# Altium PCB STLINKV2-1.PcbDoc
Units mil, origin at the board's own origin, x right, y up, seen from the top; angles counter-clockwise.
Board outline 1970 x 575 mil, 2 copper layers (Top Layer, Bottom Layer); 51 components, 48 nets, 172 pads, 67 vias.
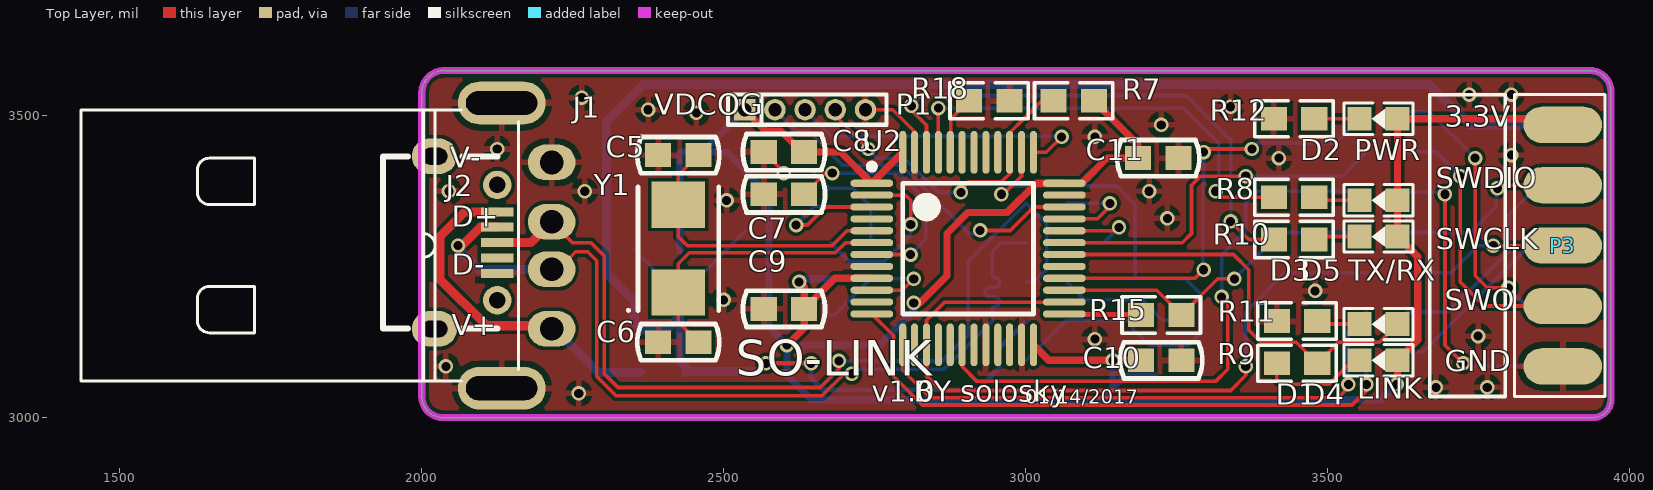
[diagram p0: Top Layer view]
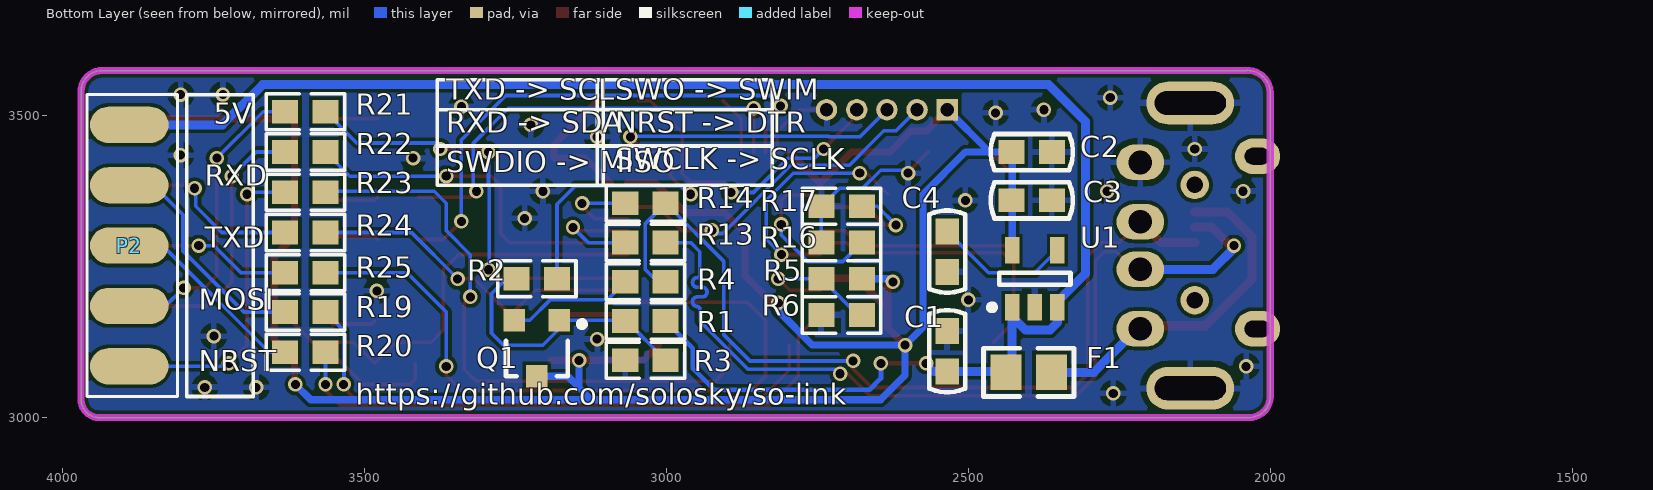
[diagram p1: Bottom Layer view, seen from below]
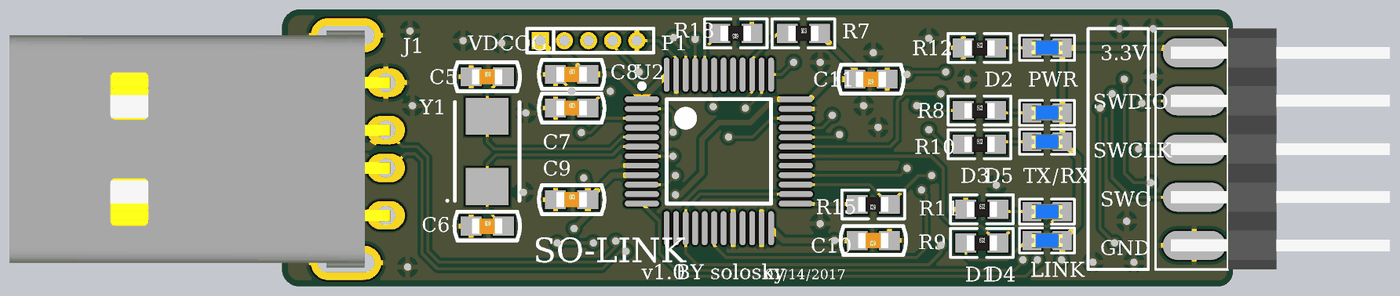
[diagram p2: 3D render of the assembled board from above, using the file's embedded part models]
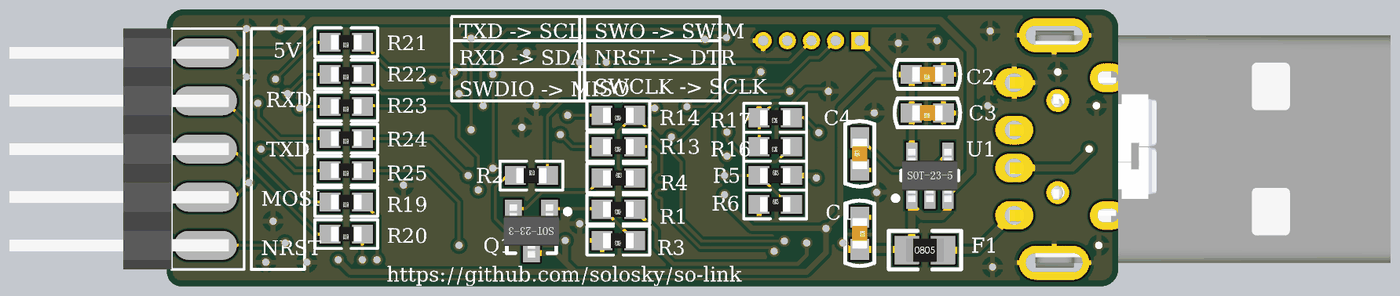
[diagram p3: 3D render of the assembled board from below, using the file's embedded part models]

## Layer stack, top to bottom
Top Solder: solder mask 0.4, Solder Resist, Dk 3.5
Top Layer: signal copper 1.4
Dielectric 1: dielectric 12.6, FR-4, Dk 4.8
Bottom Layer: signal copper 1.4
Bottom Solder: solder mask 0.4, Solder Resist, Dk 3.5

## Board outline
2035,3000 cw(c2035,3035) 2000,3035 2000,3540 cw(c2037.5,3537.5) 2040,3575 3935,3575 cw(c3935,3540) 3970,3540 3970,3030 cw(c3940,3030) 3940,3000

## Design rules (kind name [scope] priority, off if disabled: settings)
Clearance [All] p1: gap=6
ComponentClearance [All] p1 off: gap=10 collisioncheckmode=3 verticalgap=10 showdistances=FALSE
DiffPairsRouting [All] p1: maxlimit=10 minlimit=6 mostfreqgap=6 toplayer_minwidth=6 toplayer_maxwidth=15 toplayer_prefwidth=6 bottomlayer_minwidth=6 bottomlayer_maxwidth=15 bottomlayer_prefwidth=6 maxuncoupledlength=500
Height [All] p1 off: minheight=0 maxheight=1000 prefheight=500
PolygonConnect [All] p1: connectstyle=Relief reliefconductorwidth=10 reliefentries=4 polygonreliefangle="90 Angle" airgapwidth=10
RoutingVias [All] p1: holewidth=15 width=24 viastyle="Through Hole" minholewidth=15 minwidth=24 maxholewidth=15 maxwidth=24
SolderMaskExpansion [All] p1: expansion=4
UnpouredPolygon [All] p1: allowunpoured=FALSE
Width [All] p1: maxlimit=15 minlimit=6 preferedwidth=6
26 further rules are at their usual default settings.

## Classes and differential pairs
net class DIff: USB_N USB_P
differential pair USB: +USB_P -USB_N

## Components (designator, comment, footprint, x,y, rotation, side; value= is the part's Value field where it differs from the comment)
C1 "Cap" C-0603 2535,3110 r270 bottom
C2 "Cap" C-0603 2395,3440 r0 bottom
C3 "Cap" C-0603 2395,3360 r0 bottom
C4 "Cap" C-0603 2535,3275 r90 bottom
C5 "Cap" C-0603 2425,3435 r0 top
C6 "Cap" C-0603 2425,3125 r0 top
C7 "Cap" C-0603 2600,3370 r0 top
C8 "Cap" C-0603 2600,3440 r0 top
C9 "Cap" C-0603 2600,3180 r0 top
C10 "Cap" C-0603 3225,3095 r180 top
C11 "Cap" C-0603 3220,3430 r180 top
D1 "LED" SMT_LED_0603 3585,3155 r180 top
D2 "PWR" SMT_LED_0603 3585,3495 r180 top
D3 "DIN" SMT_LED_0603 3585,3360 r180 top
D4 "LED" SMT_LED_0603 3585,3095 r180 top
D5 "DOUT" SMT_LED_0603 3585,3300 r180 top
F1 "Fuse1" 0805-1 2400,3075 r180 bottom
J1 "USB" USB-B 2160,3285 r90 top
J2 "USB_M" USB_MICRO_5S_B 2125,3290 r90 top
P1 "SWD" SIP5-1.27 2585,3510 r180 top
P2 "P_BOTTOM" "HEADER 5" 3890,3485 r270 bottom
P3 "P_TOP" "HEADER 5" 3890,3085 r90 top
Q1 "NPN" SOT23-3 3215,3115 r0 bottom
R1 "Res1" 0603-1 3035,3160 r0 bottom
R2 "Res1" 0603-1 3215,3230 r180 bottom
R3 "Res1" 0603-1 3035,3095 r0 bottom
R4 "Res1" 0603-1 3035,3225 r180 bottom
R5 "Res2" 0603-1 2710,3230 r180 bottom
R6 "Res2" 0603-1 2710,3170 r180 bottom
R7 "Res2" 0603-1 3080,3525 r0 top
R8 "Res2" 0603-1 3445,3365 r0 top
R9 "Res2" 0603-1 3450,3090 r0 top
R10 "Res2" 0603-1 3445,3295 r0 top
R11 "Res2" 0603-1 3450,3160 r0 top
R12 "Res2" 0603-1 3445,3495 r0 top
R13 "Res2" 0603-1 3035,3290 r0 bottom
R14 "Res2" 0603-1 3035,3355 r0 bottom
R15 "Res2" 0603-1 3225,3170 r180 top
R16 "Res1" 0603-1 2710,3290 r0 bottom
R17 "Res1" 0603-1 2710,3350 r0 bottom
R18 "Res2" 0603-1 2940,3525 r180 top
R19 "Res2" 0603-1 3598.46,3175 r0 bottom
R20 "Res2" 0603-1 3598.46,3108.33 r0 bottom
R21 "Res2" 0603-1 3598.46,3506.67 r0 bottom
R22 "Res2" 0603-1 3598.46,3440 r0 bottom
R23 "Res2" 0603-1 3598.46,3373.33 r0 bottom
R24 "Res2" 0603-1 3598.46,3306.67 r0 bottom
R25 "Res2" 0603-1 3598.46,3240 r0 bottom
U1 "SPX3819" SOT23-5 2390,3230 r90 bottom
U2 "STM32F103CBT6" LQFP48_N 2905,3280 r0 top locked
Y1 "8M" "XAL5032 2-Leads" 2425,3280 r90 top

## Footprints (in the part's own frame and the unit in brackets; to place one, negate y for a bottom-side part, rotate by r counter-clockwise, add the part's x,y. Pads: shape width x height; smd on the part's side, far side on the other; paste and mask are expansions set on the pad)
0603-1 [mm] "0603带丝印"
  rect 1.1x1 smd: 1(-0.85,0) 2(0.85,0)
  silkscreen extent -1.65,-0.76 1.65,0.76, body extent -0.8,-0.4 0.8,0.4, height 0.3
0805-1 [mm] "0805带丝印"
  rect 1.3x1.5 smd: 1(-0.95,0) 2(0.95,0)
  silkscreen extent -1.91,-1.02 1.91,1.02, body extent -1,-0.62 1,0.63, height 0.5
C-0603 [mm] "贴片电容"
  rect 1.1x1 smd: 1(-0.85,0) 2(0.85,0)
  silkscreen extent -1.73,-0.76 1.73,0.76, body extent -0.8,-0.4 0.8,0.4, height 0.3
"HEADER 5" [mil]
  oval 60x130 smd: 1(0,0) 2(100,0) 3(200,0) 4(300,0) 5(400,0)
  silkscreen extent -50,-70 450,80, body extent -50,-406 450,48, height 70
LQFP48_N [mm] "Thin QFP, 48-Leads, Body 7x7mm, Pitch 0.5mm, IPC Medium Density"
  oval 1.8x0.3 smd: 1(-4.05,2.75) 2(-4.05,2.25) 3(-4.05,1.75) 4(-4.05,1.25) 5(-4.05,0.75) 6(-4.05,0.25) 7(-4.05,-0.25) 8(-4.05,-0.75) 9(-4.05,-1.25) 10(-4.05,-1.75) 11(-4.05,-2.25) 12(-4.05,-2.75) 25(4.05,-2.75) 26(4.05,-2.25) 27(4.05,-1.75) 28(4.05,-1.25) 29(4.05,-0.75) 30(4.05,-0.25) 31(4.05,0.25) 32(4.05,0.75) 33(4.05,1.25) 34(4.05,1.75) 35(4.05,2.25) 36(4.05,2.75)
  oval 0.3x1.8 smd: 13(-2.75,-4.05) 14(-2.25,-4.05) 15(-1.75,-4.05) 16(-1.25,-4.05) 17(-0.75,-4.05) 18(-0.25,-4.05) 19(0.25,-4.05) 20(0.75,-4.05) 21(1.25,-4.05) 22(1.75,-4.05) 23(2.25,-4.05) 24(2.75,-4.05) 37(2.75,4.05) 38(2.25,4.05) 39(1.75,4.05) 40(1.25,4.05) 41(0.75,4.05) 42(0.25,4.05) 43(-0.25,4.05) 44(-0.75,4.05) 45(-1.25,4.05) 46(-1.75,4.05) 47(-2.25,4.05) 48(-2.75,4.05)
  silkscreen extent -4.17,-2.75 2.75,3.57, body extent -3.5,-3.5 3.5,3.5, height 1.6
SIP5-1.27 [mm]
  rect 0.9x0.9 hole 0.55: 1(1.27,0)
  round 0.9 hole 0.55: 2(0,0) 3(-1.27,0) 4(-2.54,0) 5(-3.81,0)
  silkscreen extent -4.7,-0.64 1.97,0.64
SMT_LED_0603 [mm] "SMT LED"
  rect 1x1 smd: 1(-0.8,0) 2(0.8,0)
  silkscreen extent -1.45,-0.66 1.45,0.66, body extent -0.81,-0.4 0.81,0.4, height 0.6
SOT23-3 [mm]
  rect 0.9x0.95 smd: 1(-0.95,-1.175) 2(0.95,-1.175) 3(0,1.175)
  silkscreen extent -2.03,-1.14 1.3,1.18, body extent -1.45,-1.4 1.45,1.4, height 1.2
SOT23-5 [mm] "Max4173"
  rect 1.1x0.6 smd: 1(-1.2,0.95) 2(-1.2,0) 3(-1.2,-0.95) 4(1.2,-0.95) 5(1.2,0.95)
  silkscreen extent -1.32,-1.5 0.25,1.93, body extent -1.4,-1.45 1.4,1.45, height 1.2
USB-B [mm]
  oval 1.5x2 hole 1: 1(-3.5,-1.4) 2(-1,-1.4) 3(1,-1.4) 4(3.5,-1.4)
  oval 1.8x3.7 hole 1 slot 3 at 90 deg: 5(6,0.7) 6(-6,0.7)
  silkscreen extent -5.69,0 5.71,18.4, body extent -6.25,-1.63 6.25,18.4, height 4.52
USB_MICRO_5S_B [mil] "USB Micro SMT 5S B"
  rect 15x54 smd: 1(51,0) 2(25.5,0) 3(0,0) 4(-25.5,0) 5(-51,0)
  oval 59.06x74.8 hole 27.56 slot 43.31 at 90 deg: 6(-143,104) 7(143,104)
  round 47.24 hole 27.5: 8(95.5,0) 9(-95.5,0)
  silkscreen extent -143,0 143,189, body extent -161,-9 161,204, height 105
"XAL5032 2-Leads" [mm] "DFN, 2-Leads, Body 3.20x5.00mm, Pitch 3.70mm, IPC Low Density"
  rect 1.95x2.25 smd: 1(-1.85,0) 2(1.85,0)
  silkscreen extent -2.65,-1.7 2.6,2.15, body extent -2.6,-1.7 2.6,1.7, height 0.45

## Part data
C1 C2 C3 C4 C8 C9 C10 C11: "Capacitor"
D1 D4: "LED 发光二极管"
D2 D3 D5: library part LED2, "Typical RED, GREEN, YELLOW, AMBER GaAs LED"
F1: "保险丝"
J1: "USB接口"
J2: "Micro/Mini USB"
P1 P2 P3: library part "Header 5", "Header, 5-Pin"
Q1: library part NPN1, "贴片三极管"
R1 R2 R3 R4 R16 R17: "贴片电阻"
R5 R6 R7 R8 R9 R10 R11 R12 R13 R14 R15 R18 R19 R20 R21 R22 R23 R24 R25: "Resistor"
U2: library part STM32F103C8T6, "STM32 ARM-based 32-bit MCU with 64 Kbytes Flash, 48-pin LQFP, Industrial Temperature"
Y1: library part XTAL

## Via types
v1: diameter 24, hole 15, Top Layer to Bottom Layer, tented both sides, 67 vias

## Nets (pads, with @x,y where several pads share a name; then routed paths per layer and width w, separated by ;. In a path a pad name is that pad's centre, name@x,y a point inside that pad or via, vN(x,y) a via of type N, cw(c..) or ccw(c..) an arc to the next point about the centre after c; other vN are vias at no path point)
3.3V: C2.2 C3.2 C8.2 C9.2 C10.2 C11.2 D2.1 D3.1 D4.1 D5.1 P1.1 P3.5 Q1.3 R5.2 R7.2 U1.5 U2.1 U2.9 U2.24 U2.36 U2.48 | length 4367.6
  Top Layer w12: P1.1 2570,3475 2595,3475 2630,3440 2693.82,3440 U2.1 U2.48 ; v1(2605,3120) 2633.46,3148.46 C9.2 ; v1(2625,3225) 2633.46,3216.54 C9.2 ; U2.9 2684.25,3230.79 C9.2 ; v1(2815,3190) 2825,3190 2870,3235 2870,3305 2905,3340 2970,3340 3018.27,3388.27 U2.36 ; U2.24 3038.82,3095 v1(3145,3095) C10.2 ; U2.36@3093.27,3388.27 3135,3430 C11.2 3186.54,3451.93 R7.2 ; v1@3616.5,3055 D4.1 3650,3128.5 3650,3266.5 D5.1 D3.1 D2.1 3880,3495 P3.5
  Bottom Layer w12: U1.5 2427.4,3438.94 C2.2 2465,3440 ; P1.1 2465,3440 ; v1(2625,3225) 2630,3230 R5.2 ; 2645,3030 2605,3070 v1(2605,3120) ; 2645.35,3029.65 3589.65,3029.65 v1(3615,3055) ; v1(2815,3190) 2815,3176.97 2758.53,3120.5 2605.5,3120.5 v1(2605,3120) ; 3125,3030 3145,3050 ; v1(3145,3095) 3145,3050 ; Q1.3 3163.74,3068.74 3145,3050 ; 2465,3440 2505,3440 2575,3370 2575,3150 v1(2605,3120)
5V: C1.2 F1.1 P2.1 R1.1 U1.1 U1.3 | length 2851.4
  Top Layer w8: v1(2570,3090) v1(2645,3090)
  Bottom Layer w8: v1(2645,3090) 2645,3065 2663.85,3046.15 2921.15,3046.15 2956.54,3081.54 2956.54,3115 R1.1
  Bottom Layer w12: 2556.54,3076.54 v1(2570,3090)
  Bottom Layer w15: U1.3 2352.6,3157.4 2365,3145 2405,3145 U1.1@2427.4,3167.4 ; U1.3@2352.6,3191.61 2306.24,3237.97 2306.24,3490.7 2367.25,3551.72 3669.26,3551.72 3735.98,3485 P2.1 ; U1.1 2427.4,3093.85 2437.4,3083.85 F1.1 2438.94,3076.54 C1.2 2556.54,3076.54
BOOT0: R18.2 U2.44 | length 98.4
  Top Layer w6: U2.44 2876,3439.98 2876,3494.46 R18.2
GND: C1.1 C2.1 C3.1 C4.1 C5.1 C6.1 C7.1 C8.1 C9.1 C10.1 C11.1 J1.4 J1.5 J1.6 J2.5 P1.5 P3.1 R3.2 R6.1 R11.1 R12.1 R16.2 R17.2 R18.1 U1.2 U2.8 U2.20 U2.23 U2.35 U2.47 | length 409.9
  Top Layer w6: C8.1 2600,3406.54 v1(2600,3405) ; P1.5 2780,3510 2816.42,3473.58 U2.47
  Bottom Layer w6: v1(2600,3405) 2605,3410 2645.3,3410 2675.3,3380 2713.46,3380 R17.2 R16.2
  other v1: 2260,3040 3680,3050 3765,3050 2040,3085 3115,3130 3750,3135 2500,3195 3480,3210 3235,3330 2505,3360 2045,3375 2270,3375 3205,3375 3420,3430 3805,3435 2125,3445 3115,3465 3225,3485 2455,3505 2375,3510 3340,3515 2265,3530 3735,3535 3805,3535
NetC4_2: C4.2 U1.4 | length 226.2
  Bottom Layer w6: U1.4 2389.84,3240 2466.54,3240 C4.2
NetC7_2: C7.2 U2.7 | length 399.2
  Top Layer w6: C7.2 2668.46,3405 v1(2680,3405) ; U2.7 v1(2809.84,3270.16)
  Bottom Layer w6: v1(2680,3405) 2790,3405 2835,3360 2835,3295.32 v1(2809.84,3270.16)
NetD1_2: D1.2 R11.2 | length 72.1
  Top Layer w6: R11.2 3488.46,3155 D1.2
NetD2_2: D2.2 R12.2 | length 75
  Top Layer w6: R12.2 D2.2
NetD3_2: D3.2 R8.2 | length 77.1
  Top Layer w6: R8.2 3483.46,3360 D3.2
NetD4_2: D4.2 R9.1 | length 183.6
  Top Layer w6: R9.1 3416.54,3063.46 3425,3055 3502.53,3055 3542.53,3095 D4.2
NetD5_2: D5.2 R10.2 | length 77.1
  Top Layer w6: R10.2 3483.46,3300 D5.2
NetQ1_1: Q1.1 R1.2 R2.1 R3.1 | length 466.3
  Bottom Layer w6: R3.1 3066.54,3160 R1.2 3069.72,3161.26 Q1.1 3177.6,3147.4 3205,3120 3270,3120 3290,3140 3290,3205 3265,3230 R2.1
NetQ1_2: Q1.2 R4.1 | length 210.3
  Bottom Layer w6: R4.1 3098.46,3195 3193,3195 3226.74,3161.26 Q1.2
NetR5_1: R5.1 R6.2 U2.10 | length 240.6
  Top Layer w6: U2.10 2796.1,3211.1 v1(2815,3230)
  Bottom Layer w6: R6.2 2683.46,3170 R5.1 v1(2815,3230)
NetR13_2: R13.2 U2.32 | length 189.7
  Top Layer w6: U2.32 3149.53,3309.53 v1(3155,3315)
  Bottom Layer w6: R13.2 3130,3290 v1(3155,3315)
NetR14_2: R14.2 U2.33 | length 160.7
  Top Layer w6: U2.33 3119.21,3329.21 3140,3350 v1(3140,3355)
  Bottom Layer w6: R14.2 v1(3140,3355)
NetR16_1: R16.1 U2.2 | length 290.1
  Top Layer w6: U2.2 2801.42,3368.58 2810,3360 v1(2810,3320)
  Bottom Layer w6: R16.1 2707.85,3258.69 2766.22,3258.69 2810,3302.47 v1(2810,3320)
NetR17_1: R17.1 U2.3 | length 207.3
  Top Layer w6: v1(2620,3319) 2639,3319 2668.9,3348.9 U2.3
  Bottom Layer w6: v1(2620,3319) 2651,3350 R17.1
OS_IN: C5.2 U2.5 Y1.2 | length 485.8
  Top Layer w6: C5.2 2425,3401.54 Y1.2 2425,3300 2440,3285 2680,3285 2704.53,3309.53 U2.5
OS_OUT: C6.2 U2.6 Y1.1 | length 478.8
  Top Layer w6: C6.2 2425,3158.46 Y1.1 2425,3255 2443,3273 2685,3273 2701.84,3289.84 U2.6
P_MOSI: P2.4 R21.2 | length 505.5
  Top Layer w6: v1(3745,3430) 3745,3235 3765,3215 v1(3800,3215)
  Bottom Layer w6: R21.2 3668.33,3506.67 v1(3745,3430) ; v1(3800,3215) 3830,3185 P2.4
P_NRST: P2.5 R23.2 | length 523.9
  Top Layer w6: v1(3695,3370) 3695,3120 v1(3725,3090)
  Bottom Layer w6: R23.2 3691.67,3373.33 v1(3695,3370) ; v1(3725,3090) 3730,3085 P2.5
P_RXD: P2.2 R19.2 | length 380.2
  Bottom Layer w6: R19.2 3700,3175 3801,3276 3801,3336 3850,3385 P2.2
P_SWCLK: P3.3 R25.2 | length 276.7
  Top Layer w6: v1(3775,3285) P3.3
  Bottom Layer w6: R25.2 3705,3240 3750,3285 v1(3775,3285)
P_SWDIO: P3.4 R24.2 | length 307.1
  Top Layer w6: v1(3781.65,3380) 3786.65,3385 P3.4
  Bottom Layer w6: R24.2 3736.67,3306.67 3780,3350 3780,3378.35 v1(3781.65,3380)
P_SWO: P3.2 R22.2 | length 466.2
  Top Layer w6: v1(3720,3400) 3720,3225 3760,3185 P3.2
  Bottom Layer w6: R22.2 3680,3440 v1(3720,3400)
P_TXD: P2.3 R20.2 | length 311.2
  Bottom Layer w6: R20.2 3658.33,3108.33 3835,3285 P2.3@3870,3285
RX_LED: R10.1 U2.46 | length 872.9
  Top Layer w6: v1(2811.03,3516.49) 2811.03,3509.27 2836.1,3484.2 U2.46 ; v1(3340,3325) 3370,3295 R10.1
  Bottom Layer w6: v1(2811.03,3516.49) 2828.1,3533.56 3266.44,3533.56 3340,3460 v1(3340,3325)
STA_LED: D1.1 R9.2 U2.30 | length 712.2
  Top Layer w6: U2.30 3344.84,3270.16 3370,3245 3370,3145 3390,3125 3448.46,3125 R9.2 3518.46,3125 3586.5,3125 D1.1
SWCLK0: P1.3 U2.37 | length 508.9
  Top Layer w6: U2.37 3034.45,3439.45 v1(3060,3465)
  Bottom Layer w6: P1.3 2680,3465 2730.3,3465 2731.3,3466 3059,3466 v1(3060,3465) ; P1.3@2640,3525 P1.3@2645,3520
SWDIO0: P1.2 U2.34 | length 589.6
  Top Layer w6: v1(2925,3310) 2975,3310 3013.9,3348.9 U2.34
  Bottom Layer w6: P1.2 2620,3475 2640,3475 2697.09,3417.91 2794.06,3417.91 2906.97,3305 2920,3305 v1(2925,3310) ; P1.2@2590,3525 P1.2@2595,3520
SWO0: P1.4 R7.1 U2.39 | length 530.1
  Top Layer w6: P1.4 2685,3500 v1(2740,3445) ; v1(2892.98,3373.01) 2892.98,3377.98 2906,3391 2961,3391 2973.9,3403.9 U2.39 2973.9,3471.9 2998.31,3496.31 2998.85,3496.31 3004.12,3501.59 3004.12,3502.12 3027,3525 R7.1
  Bottom Layer w6: v1(2740,3445) 2755.09,3429.91 2799.03,3429.91 2855.93,3373.01 v1(2892.98,3373.01)
T_JTCK: R25.1 U2.15 U2.26 | length 1214.2
  Top Layer w6: U2.26 2866.42,3191.42 2836.1,3161.1 U2.15 2836.1,3068.9 2860,3045 3340,3045 3365,3070 v1(3365,3085)
  Bottom Layer w6: v1(3365,3085) 3365,3175 3430,3240 R25.1
T_JTDI: U2.17
T_JTDO: U2.16
T_JTMS: R15.1 R24.1 U2.27 | length 573.2
  Top Layer w6: U2.27 3217.36,3211.1 R15.1 3318.46,3230 v1@3345,3230
  Bottom Layer w6: v1(3346,3230) 3422.67,3306.67 R24.1
T_MOSI: R21.1 U2.28 | length 729.9
  Top Layer w6: U2.28 3280.79,3230.79 v1(3295,3245) ; v1(3295,3440) 3300,3445 v1(3375,3445)
  Bottom Layer w6: v1(3295,3245) 3294,3246 3294,3384.7 3295,3385.7 v1(3295,3440) ; v1(3375,3445) 3385,3455 3513.33,3455 R21.1
T_NRST: R23.1 U2.18 | length 1005
  Top Layer w6: U2.18 2895.16,3084.68 2919.84,3060 3315,3060 3335,3080 3335,3190 v1(3325,3200)
  Bottom Layer w6: v1(3325,3200) 3325,3270 3365,3310 3365,3355 3385,3375 3563.33,3375 R23.1 R23.1@3560.67,3369
T_RXD: R19.1 U2.13 | length 944.2
  Top Layer w6: U2.13 2796.73,3078.43 2842.16,3033 3518,3033 3535,3050 v1(3535,3055)
  Bottom Layer w6: v1(3535,3055) 3534.35,3055.65 3534.35,3144.35 R19.1
T_SWDIO_IN: R15.2 U2.25 | length 253.2
  Top Layer w6: U2.25 3189.8,3171.73 R15.2 U2.25@3066.18,3170
T_SWO: R22.1 U2.31 | length 609.6
  Top Layer w6: U2.31 3259.84,3289.84 3275,3305 3275,3385 3290,3400 v1(3365,3400)
  Bottom Layer w6: v1(3365,3400) 3525,3400 R22.1
T_TXD: R20.1 U2.12 | length 994.6
  Top Layer w6: U2.12 2781.83,3135.46 2781.83,3068.17 2829,3021 3541,3021 3565,3045 v1(3565,3055)
  Bottom Layer w6: v1(3565,3055) R20.1
TX_LED: R8.1 U2.45 | length 746.9
  Top Layer w6: U2.45 v1(2855.79,3512.56) ; v1(3315,3375) 3325,3365 R8.1
  Bottom Layer w6: v1(2855.79,3512.56) 3262.44,3512.56 3320,3455 3320,3375 v1(3315,3375)
TXD0: U2.21
USB_N: J1.2 J2.2 R13.1 | length 1475.4
  Top Layer w6: J1.2 2225.63,3245.63 2255,3275 2275,3275 2290,3260 2290,3068.03 2321.51,3036.51 2663.49,3036.51 2699.62,3072.65 v1(2712.35,3072.65)
  Top Layer w15: v1@2066.41,3285 2096.91,3315.5 J2.2
  Bottom Layer w6: v1(2712.35,3072.65) 2719.7,3080 2865,3080 2945,3160 2945,3168 2945,3180 cw(c2949,3180) 2949,3184 ccw(c2949,3192) 2957,3192 ccw(c2949,3192) 2949,3200 2945,3200 2941,3200 cw(c2941,3208) 2933,3208 cw(c2941,3208) 2941,3216 2945,3216 2949,3216 ccw(c2949,3224) 2957,3224 ccw(c2949,3224) 2949,3232 cw(c2949,3236) 2945,3236 2945,3245 2945,3275 2960,3290 R13.1
  Bottom Layer w15: v1(2060,3285) 2060,3280.63 2095,3245.63 J1.2
USB_P: J1.3 J2.3 R4.2 R14.1 | length 1489.2
  Top Layer w6: J1.3 2249.49,3290 2280,3290 2302,3268 2302,3073 2325,3050 2660,3050 2691.14,3081.14 v1(2691.14,3093.86)
  Top Layer w15: J2.3 2180.75,3290 J1.3
  Bottom Layer w6: v1(2691.14,3093.86) 2861.89,3093.86 2905,3136.97 2905,3258.46 R14.1 3035,3321.54 3035,3245 3015,3225 R4.2
USB_RENM: R2.2 U2.38 | length 448.8
  Top Layer w6: v1(2960,3370) 2963.79,3370 2993.58,3399.79 U2.38
  Bottom Layer w6: v1(2960,3370) 2962.47,3370 2976.15,3383.69 3151.31,3383.69 3181.54,3353.46 R2.2
VBUS: F1.2 J1.1 J2.1 | length 579.1
  Top Layer w15: J2.1 2071,3341 2030,3300 2030,3229.47 2107.26,3152.2 J1.1@2215.12,3152.2
  Bottom Layer w15: J1.1@2215.12,3152.2 2292.32,3075 F1.2
pads on no net: J2.4 J2.6 J2.7 J2.8 J2.9 U2.4 U2.11 U2.14 U2.19 U2.22 U2.29 U2.40 U2.41 U2.42 U2.43

## Polygon pours and split planes (outlines as drawn)
GND on Top Layer "Top Layer" (solid, pour order 4): 2000,3000 3968.5,3000 3968.5,3570.87 2000,3570.87
GND on Bottom Layer "Bottom Layer" (solid, pour order 6): 2000,3000 3968.5,3000 3968.5,3570.87 2000,3570.87

## Keep-outs
Keep-Out Layer:
  the board outline again, w11.81

## Silkscreen, mask and mechanical layers (free items; w line width, h text height)
Top Overlay:
  lines w6: 3670,3035 3670,3535 3795,3535 3795,3035 3670,3035
  text "VDCOG" at 2385,3490 h60
  text "3.3V" at 3695,3470 h60
  text "PWR" at 3545,3415 h60
  text "SWDIO" at 3680,3368.78 h60
  text "SWCLK" at 3680,3267.56 h60
  text "TX/RX" at 3535,3215 h60
  text "SWO" at 3695,3166.33 h60
  text "GND" at 3695,3065 h60
  text "SO-LINK" at 2520,3050 h100
  text "LINK" at 3550,3020 h60
  text "v1.0" at 2745,3015 h60
  text "BY solosky" at 2815,3015 h60
  text "01/14/2017" at 3000,3015 h40
Bottom Overlay:
  lines w6: 2825,3450 3380,3450 ; 2825,3510 3380,3510 ; 3105,3385 3105,3560 ; 3115,3385 3115,3560 ; 2825,3385 2825,3560 3380,3560 3380,3385 2825,3385 ; 3685,3035 3795,3035 3795,3535 3685,3535 3685,3035
  text "SWO -> SWIM" at 3085,3515 h60
  text "TXD -> SCL" at 3365,3515 h60
  text "5V" at 3750,3475 h60
  text "NRST -> DTR" at 3085,3460 h60
  text "RXD -> SDA" at 3365,3460 h60
  text "SWCLK -> SCLK" at 3085,3400 h60
  text "SWDIO -> MISO" at 3365,3395 h60
  text "RXD" at 3765,3372.42 h60
  text "TXD" at 3765,3269.94 h60
  text "MOSI" at 3775,3167.47 h60
  text "NRST" at 3775,3065 h60
  text "https://github.com/solosky/so-link" at 3515,3010 h60

## Text inside footprints (layer, text, board x,y; h text height)
J1: Top Overlay "D+" at 2050,3305 h60; Top Overlay "V+" at 2050,3125 h60; Top Overlay "V-" at 2047,3402.13 h60; Top Overlay "D-" at 2050,3225 h60